# Altium PCB bai 3.PcbDoc
Units mil, origin at the board's own origin, x right, y up, seen from the top; angles counter-clockwise.
Board outline 5845.03 x 3630.03 mil, 2 copper layers (Top Layer, Bottom Layer); 20 components, 22 nets, 87 pads, 0 vias.
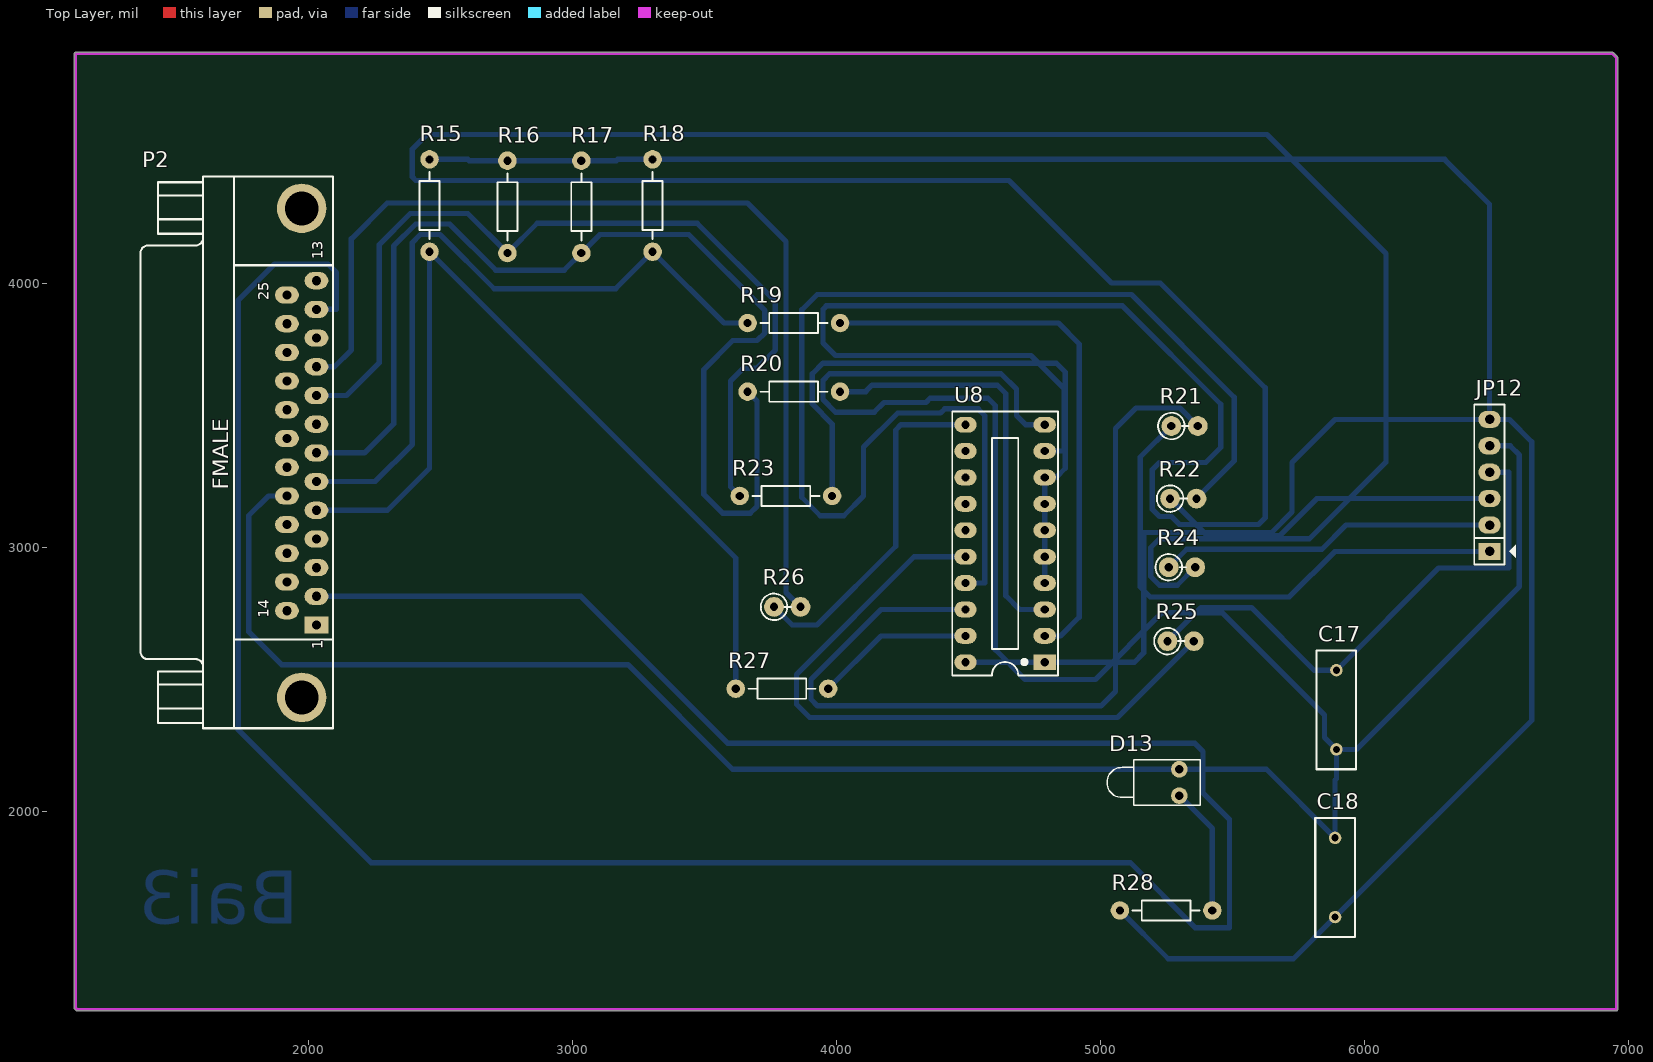
[diagram p0: Top Layer view]
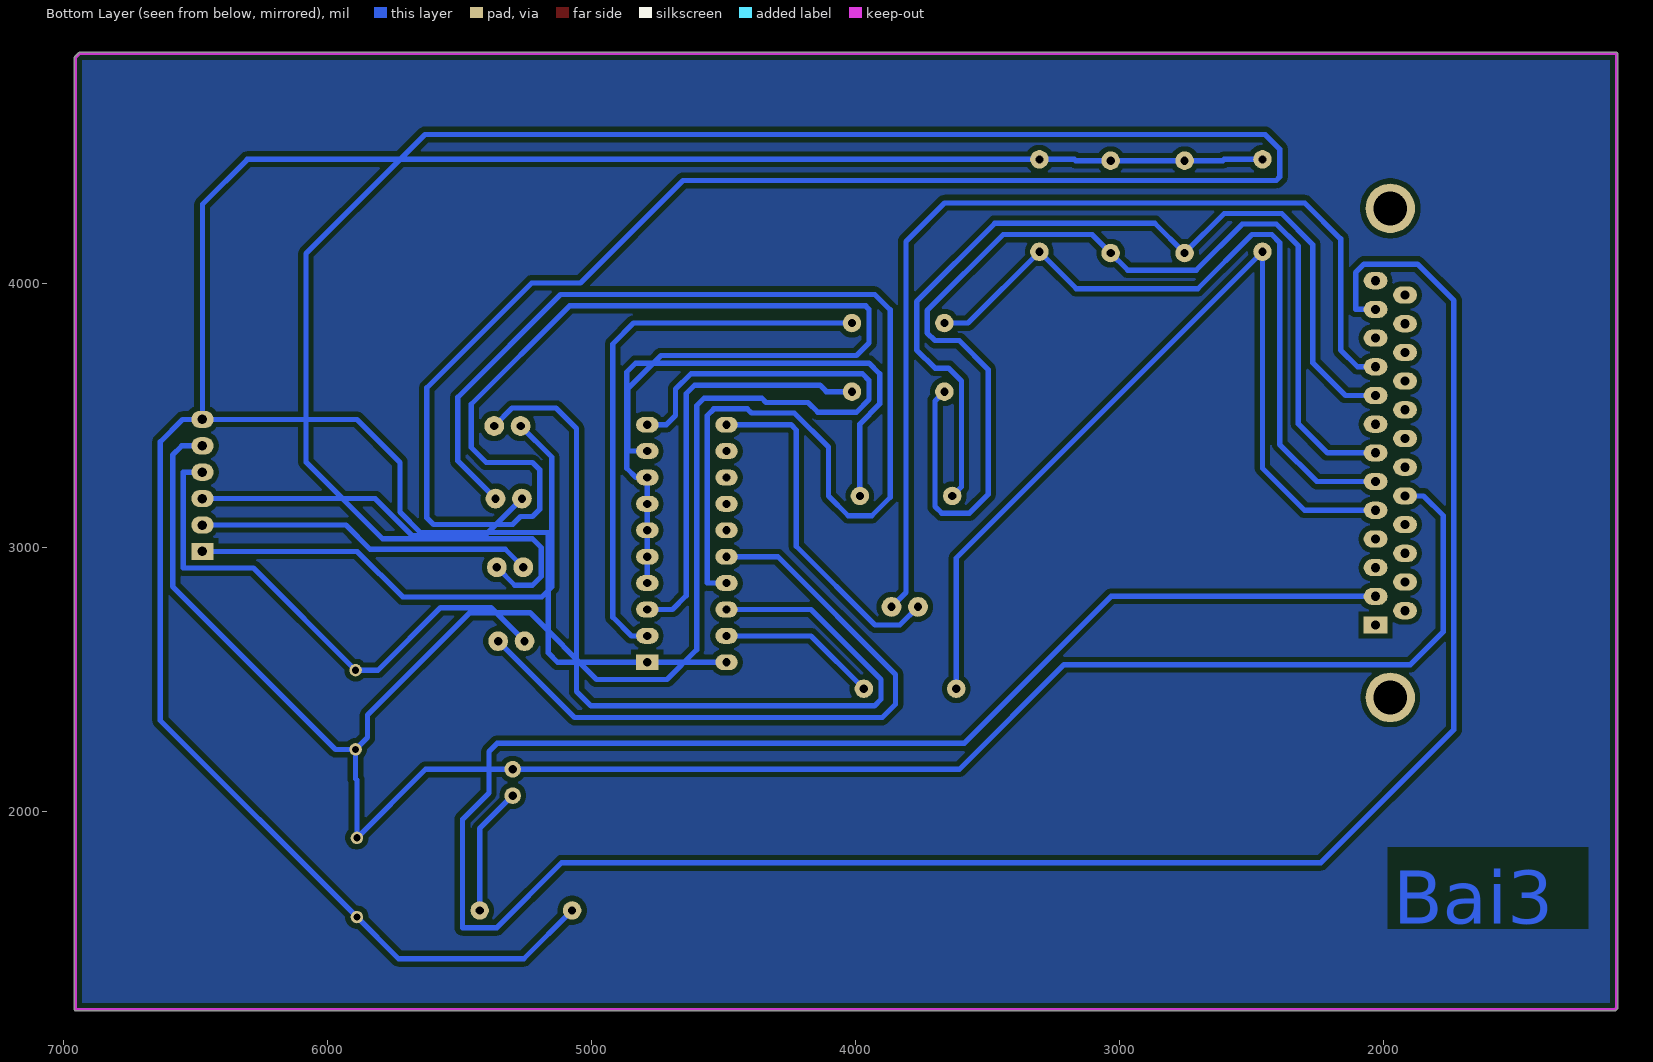
[diagram p1: Bottom Layer view, seen from below]
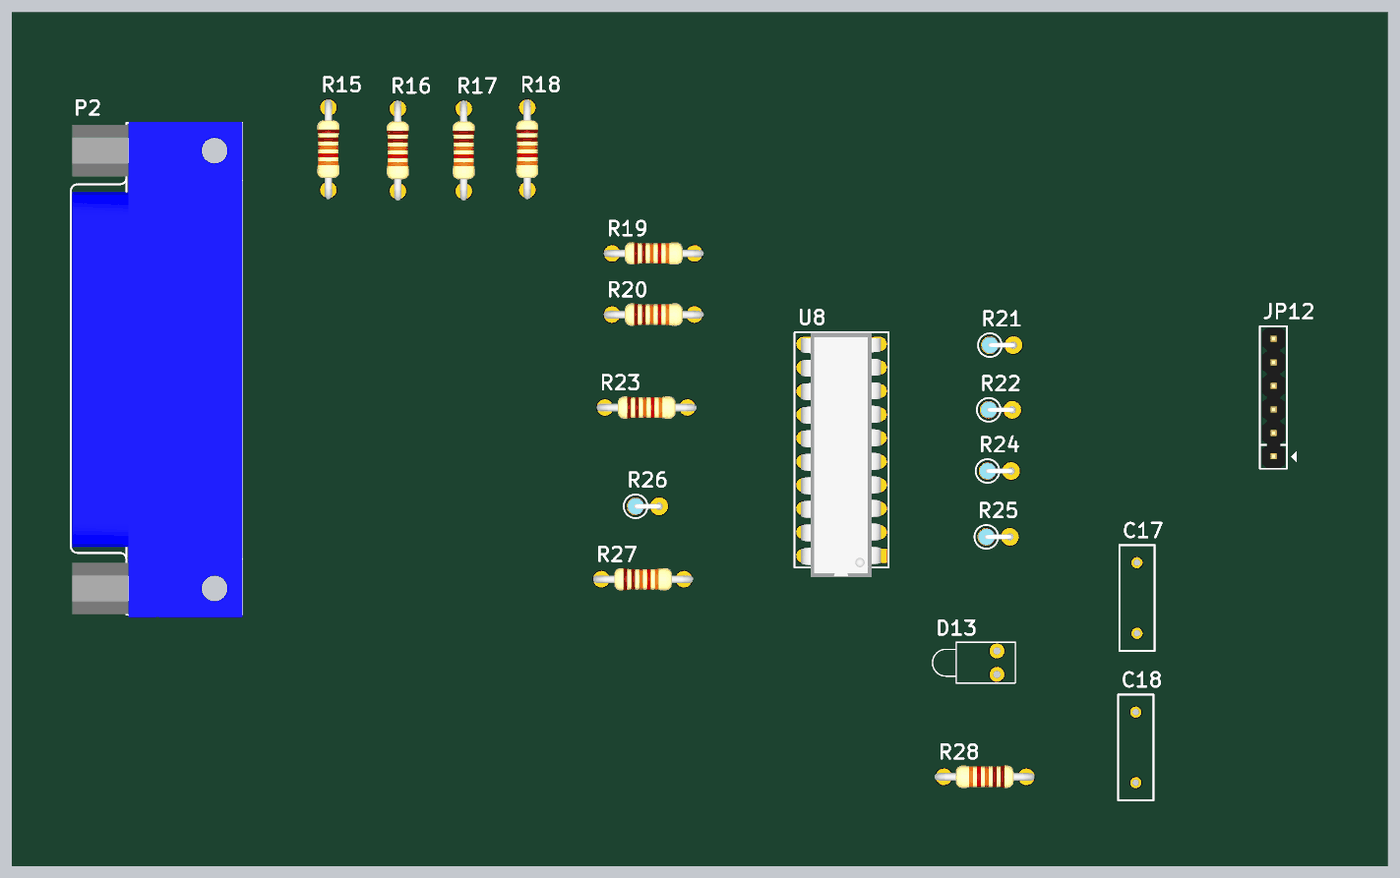
[diagram p2: 3D render of the assembled board from above, using the file's embedded part models]

## Layer stack, top to bottom
Top Solder: solder mask 0.4, Solder Resist, Dk 3.5
Top Layer: signal copper 1.4
Dielectric 1: dielectric 12.6, FR-4, Dk 4.8
Bottom Layer: signal copper 1.4
Bottom Solder: solder mask 0.4, Solder Resist, Dk 3.5

## Board outline
1114.98,1255 1114.98,4864.95 cw(c1120,4865) 1115.65,4867.5 cw(c1120,4870) 1120,4875.01 6940,4875.01 cw(c6940,4870) 6943.56,4873.53 6943.55,4873.55 6958.55,4858.55 6958.53,4858.56 cw(c6955,4855) 6960.02,4855 6960.02,1250 cw(c6955,1250) 6955,1244.98 1125,1244.98 cw(c1125,1250) 1121.44,1246.47 1121.45,1246.45 1116.45,1251.45 1116.47,1251.44 cw(c1120,1255)

## Design rules (kind name [scope] priority, off if disabled: settings)
Clearance [All] p1: gap=20 ignorepadtopadclearanceinfootprint=FALSE
PolygonConnect [All] p1: connectstyle=Relief reliefconductorwidth=10 reliefentries=4 polygonreliefangle="90 Angle" airgapwidth=10
RoomDefinition "bai 3" [InComponentClass('bai 3')] p1: confinementstyle=ConfineIn formatcopy=TRUE lockcomponents=FALSE outline 7045,1065 12450,1065 12450,3285 7045,3285
RoutingLayers [All] p1: top layer_v5=FALSE bottom layer_v5=TRUE
RoutingVias [All] p1: holewidth=28 width=50 viastyle="Through Hole" minholewidth=28 minwidth=50 maxholewidth=28 maxwidth=50
SolderMaskExpansion [All] p1: expansion=4 istentingtop=FALSE
Width [All] p1: maxlimit=30 minlimit=15 preferedwidth=20
29 further rules are at their usual default settings.

## Components (designator, comment, footprint, x,y, rotation, side; value= is the part's Value field where it differs from the comment)
C17 "Cap" RAD-0.3 5895,2385 r90 top value=10n
C18 "Cap" RAD-0.3 5890,1750 r90 top value=100n
D13 "LED" LED-1 5300,2110 r180 top
JP12 "JP6 PIN" JP6 6475,2985 r90 top value=JP7
P2 "MALE DB25" "DSB 25-F" 1975.91,3358.25 r90 top value="LPT 25"
R15 "Res1" R1/4W 2460,4120 r90 top value=4K7
R16 "Res1" R1/4W 2755,4115 r90 top value=4K7
R17 "Res1" R1/4W 3035,4115 r90 top value=4K7
R18 "Res1" R1/4W 3305,4120 r90 top value=4K7
R19 "Res1" R1/4W 4015,3850 r180 top value=1K
R20 "Res1" R1/4W 4015,3590 r180 top value=1K
R21 "Res1" R1/4W1 5270,3460 r0 top value=100
R22 "Res1" R1/4W1 5265,3185 r0 top value=100
R23 "Res1" R1/4W 3985,3195 r180 top value=1K
R24 "Res1" R1/4W1 5260,2925 r0 top value=100
R25 "Res1" R1/4W1 5255,2645 r0 top value=100
R26 "Res1" R1/4W1 3765,2775 r0 top value=100
R27 "Res1" R1/4W 3970,2465 r180 top value=1K
R28 "Res1" R1/4W 5075,1625 r0 top value=1K
U8 "74245" DIP20/W0.3 4790,2565 r90 top

## Footprints (in the part's own frame and the unit in brackets; to place one, negate y for a bottom-side part, rotate by r counter-clockwise, add the part's x,y. Pads: shape width x height; smd on the part's side, far side on the other; paste and mask are expansions set on the pad)
DIP20/W0.3 [mil] "DIP 20, 20 PIN, W 300mil, Pin to pin 100mil"
  rect 60x85 hole 31: 1(0,0)
  oval 60x85 hole 31: 2(100,0) 3(200,0) 4(300,0) 5(400,0) 6(500,0) 7(600,0) 8(700,0) 9(800,0) 10(900,0) 11(900,300) 12(800,300) 13(700,300) 14(600,300) 15(500,300) 16(400,300) 17(300,300) 18(200,300) 19(100,300) 20(0,300)
  silkscreen extent -50,-50 950,350, body extent -91,-18 945,322, height 155
"DSB 25-F" [mil] "LPT FMALE - D Subminiature; 25 Position; Right Angle; Pitch 1.385 mm"
  rect 65x90 hole 35: 1(-652.2,-55.91)
  oval 65x90 hole 35: 2(-543.5,-55.91) 3(-434.8,-55.91) 4(-326.1,-55.91) 5(-217.4,-55.91) 6(-108.7,-55.91) 7(0,-55.91) 8(108.7,-55.91) 9(217.4,-55.91) 10(326.1,-55.91) 11(434.8,-55.91) 12(543.5,-55.91) 13(652.2,-55.91) 14(-597.85,55.91) 15(-489.15,55.91) 16(-380.45,55.91) 17(-271.75,55.91) 18(-163.05,55.91) 19(-54.35,55.91) 20(54.35,55.91) 21(163.05,55.91) 22(271.75,55.91) 23(380.45,55.91) 24(489.15,55.91) 25(597.85,55.91)
  round 187.4 hole 128.35: 26(-926.22,0) 27(926.22,0)
  silkscreen extent -1043,-118 1047,610, body extent -1055,-120 1051,604, height 501
JP6 [mil] "JP6"
  rect 65x85 hole 36: 1(0,0)
  oval 65x85 hole 36: 2(100,0) 3(200,0) 4(300,0) 5(400,0) 6(500,0)
  silkscreen extent -50,-99 556,58, body extent -48,-50 548,48, height 323
LED-1 [mm] "LED; 2 Leads"
  round 1.6 hole 0.8: 1(0,1.27) 2(0,-1.27)
  silkscreen extent -2,-2.2 6.95,2.2
R1/4W [mil] "R 1/4W, 2 Pin, 350mil"
  round 70 hole 31: 1(0,0) 2(350,0)
  silkscreen extent 48,-38 302,38, body extent -40,-47 386,47, height 111
R1/4W1 [mm] "R 1/4W, 2 Pin, 150mil"
  round 1.905 hole 0.8: 1(0,0) 2(2.54,0)
  silkscreen extent -1.27,-1.28 1.65,1.28, body extent -0.89,-0.92 2.82,0.92, height 7.3
RAD-0.3 [mm] "Radial Cap, Thru-Hole; 2 Leads; 0.3 in Pin Spacing"
  round 1.2 hole 0.7: 1(-3.81,0) 2(3.81,0)
  silkscreen extent -5.71,-1.91 5.71,1.91

## Part data
C17 C18: "Capacitor", LatestRevisionDate=17-Jul-2002, LatestRevisionNote="Re-released for DXP Platform.", PackageDescription="Radial Cap, Thru-Hole; 2 Leads; 0.3 in Pin Spacing", PackageReference=RAD-0.3, Published=8-Jun-2000, Publisher="Altium Limited"
D13: library part LED1, "Typical RED GaAs LED", LatestRevisionDate=08-Jul-2005, LatestRevisionNote="Mech Layer 1 removed.", PackageDescription="LED; 2 Leads", PackageReference=LED-1, Published=8-Jun-2000, Publisher="Altium Limited"
JP12: library part JP6
P2: library part "DSB 25", "LPT 25", PackageDocument=U, DatasheetDocument=19-Mar-1999, Gender=Receptacle, LatestRevisionDate=17-Jul-2002, LatestRevisionNote="Re-released for DXP Platform.", Orientation="Right Angle", PackageReference=787202, Positions=25, Published=15-Jun-2001, Publisher="Altium Limited"
R15 R16 R17 R18 R19 R20 R23 R27 R28: library part Res1_1, "Resistor", Manufacturer="Generic Components", Class=Passive, Published=08/06/2000, Publisher="Altium Hobart Technology Centre", SubClass=Resistor
R21 R22 R24 R25 R26: library part Res1_5, "Resistor", Manufacturer="Generic Components", Class=Passive, Published=08/06/2000, Publisher="Altium Hobart Technology Centre", SubClass=Resistor
U8: "Octal bus tranceiver; 3-state", Copyright by=VanDungEvn@gmail.com

## Nets (pads, with @x,y where several pads share a name; then routed paths per layer and width w, separated by ;. In a path a pad name is that pad's centre, name@x,y a point inside that pad or via, vN(x,y) a via of type N, cw(c..) or ccw(c..) an arc to the next point about the centre after c; other vN are vias at no path point)
NetC17_1: C17.1 C18.2 D13.2 JP12.5 P2.18 U8.10 | length 11365
  Bottom Layer w20: P2.18 1850,3195.2 1775,3120.2 1775,2681 1900,2556 3212,2556 3608,2160 D13.2 5630,2160 C18.2 5890,2119 5895,2124 C17.1 ; U8.10 4718,3465 4683,3500 4683,3600 4625,3658 3975,3658 3950,3633 3950,3560 3997.77,3512.23 4144.23,3512.23 4181.34,3549.34 4340.09,3549.34 4355.75,3565 4575,3565 4603,3537 4603,2613 4716,2500 4982,2500 5235,2753 5462,2753 5850,2365 5850,2280 C17.1 ; JP12.5 6553,3385 6588,3350 6588,2852 5971,2235 C17.1
NetC17_2: C17.2 JP12.4 R25.1 | length 2039.2
  Bottom Layer w20: R25.1 5382,2772 5573,2772 5810,2535 C17.2 6282,2922 6547.58,2922 6547.58,3285 JP12.4
NetC18_1: C18.1 JP12.6 R15.2 R16.2 R17.2 R18.2 R28.1 U8.1 U8.20 | length 10908.5
  Bottom Layer w20: R15.2 2605,4470 2610,4465 R16.2 R17.2 3167,4465 3172,4470 R18.2 6305,4470 6475,4300 JP12.6 ; U8.20 U8.1 5130,2565 5165,2600 5165,3057 5650,3057 5727,3134 5727,3322 5890,3485 JP12.6 ; R28.1 5258,1442 5732,1442 C18.1 6635,2345 6635,3400 6550,3485 JP12.6
NetD13_1: D13.1 R28.2 | length 486.8
  Bottom Layer w20: D13.1 5425,1935 R28.2
NetJP12_1: JP12.1 R21.1 | length 2069.3
  Bottom Layer w20: R21.1 5152,3342 5152,2850 5190,2812 5716,2812 5889,2985 JP12.1
NetJP12_2: JP12.2 R24.1 | length 1281.3
  Bottom Layer w20: R24.1 5328,2993 5839.84,2993 5931.84,3085 JP12.2
NetJP12_3: JP12.3 R22.1 | length 1326
  Bottom Layer w20: R22.1 5405,3045 5681,3045 5821,3185 JP12.3
NetP2_2: P2.2 P2.12 | length 10657.6
  Bottom Layer w20: P2.2 3033.26,2814.74 3590,2258 5359,2258 5390,2227 5390,2070 5490,1970 5490,1560 5360,1560 5114,1806 2239,1806 1735,2310 1735,3935 1873,4073 2075,4073 2107,4041 2107,3901.75 P2.12
NetP2_5: P2.5 R15.1 R27.2 | length 3449.6
  Bottom Layer w20: P2.5 2300.85,3140.85 2460,3300 R15.1 3620,2960 R27.2
NetP2_6: P2.6 R18.1 R19.2 | length 2723.2
  Bottom Layer w20: P2.6 2254,3249.55 2395,3390.55 2395,4155 2425,4185 2500,4185 2705,3980 3165,3980 R18.1 3575,3850 R19.2
NetP2_7: P2.7 R17.1 R20.2 | length 4235
  Bottom Layer w20: P2.7 2214,3358.25 2324,3468.25 2324,4141.26 2407.74,4225 2536.14,4225 2711.14,4050 2970,4050 R17.1 3105,4185 3442,4185 3730,3897 3730,3813 3700.68,3783.67 3608.67,3783.67 3499,3674 3499,3201 3570,3130 3675,3130 3700,3155 3700,3555 R20.2
NetP2_9: P2.9 R16.1 R23.2 | length 3369.9
  Bottom Layer w20: P2.9 2145.65,3575.65 2270,3700 2270,4147.82 2387.18,4265 2605,4265 R16.1 2868.17,4228.17 3473.83,4228.17 3770,3932 3770,3748.38 3700.68,3679.05 3649.05,3679.05 3600,3630 3600,3230 R23.2
NetP2_10: P2.10 R26.2 | length 3749.1
  Bottom Layer w20: P2.10 2100.35,3684.35 2164,3748 2164,4169 2300,4305 3664,4305 3810,4159 3810,2830 R26.2
NetR19_1: R19.1 U8.2 | length 2134.1
  Bottom Layer w20: R19.1 4842,3850 4921,3771 4921,2736 4850,2665 U8.2
NetR20_1: R20.1 U8.3 | length 1585.5
  Bottom Layer w20: R20.1 4111.81,3590 4136.5,3614.69 4610.62,3614.69 4643,3582.31 4643,2817 4695,2765 U8.3
NetR21_2: R21.2 U8.18 | length 3323.4
  Bottom Layer w20: U8.18 4170,2765 3905,2500 3905,2425 3930,2400 5003,2400 5058,2455 5058,3450 5136,3528 5302,3528 R21.2
NetR22_2: R22.2 U8.17 | length 4692.8
  Bottom Layer w20: U8.17 4563,2865 4563,3500 4538,3525 4411.41,3525 4395.75,3509.34 4233.34,3509.34 4104,3380 4104,3195 4029,3120 3940,3120 3870,3190 3870,3900 3928.39,3958.39 5118.3,3958.39 5507.75,3568.95 5507.75,3327.75 R22.2
NetR23_1: R23.1 U8.4 U8.5 U8.6 U8.7 U8.8 | length 2339.2
  Bottom Layer w20: R23.1 3985,3468 3910,3543 3910,3658 3950,3698 4834,3698 4868,3664 4868,3300 4833,3265 U8.8 U8.7 U8.6 U8.5 U8.4
NetR24_2: R24.2 U8.9 | length 14350.1
  Bottom Layer w20: U8.9 4863,3365 4863,3602 4738,3727 3998,3727 3950,3775 3950,3902 3963,3915 5084.3,3915 5457,3542.3 5457,3379 5400,3322 5225,3322 5197,3294 5197,3145 5225,3117 5270,3117 5300,3087 5600,3087 5625,3112 5625,3605 5228,4002 5043,4002 4655,4390 2408,4390 2395,4403 2395,4509 2450,4564 5632,4564 6083,4113 6083,3323 5793,3033 5225,3033 5192,3000 5192,2890 5225,2857 5292,2857 R24.2
NetR25_2: R25.2 U8.16 | length 2584
  Bottom Layer w20: U8.16 4295.96,2965 3849.61,2518.66 3849.61,2406.01 3900,2355.62 5065.62,2355.62 R25.2
NetR26_1: R26.1 U8.11 | length 1326.1
  Bottom Layer w20: R26.1 3834,2706 3927.61,2706 4226,3004.39 4226,3445 4246,3465 U8.11
NetR27_1: R27.1 U8.19 | length 602.8
  Bottom Layer w20: R27.1 4170,2665 U8.19
pads on no net: P2.1 P2.3 P2.4 P2.8 P2.11 P2.13 P2.14 P2.15 P2.16 P2.17 P2.19 P2.20 P2.21 P2.22 P2.23 P2.24 P2.25 P2.26 P2.27 U8.12 U8.13 U8.14 U8.15

## Polygon pours and split planes (outlines as drawn)
no net on Bottom Layer "NONET_L02_P001" (solid, pour order 1): 1120,4870 6945,4870 6955,4860 6955,1250 1125,1250 1120,1255

## Keep-outs
Keep-Out Layer:
  lines w10: 1120,4865 1120,1255 1125,1250 6955,1250 6955,4855 6940,4870 1120,4870

## Other copper
Bottom Layer:
  text "Bai3" at 1965,1575 h200

## Text inside footprints (layer, text, board x,y; h text height)
P2: Top Overlay "FMALE" at 1696.89,3218.25 h60 r90; Top Overlay "1" at 2055.89,2615.25 h40 r90; Top Overlay "13" at 2055.89,4091.25 h40 r90; Top Overlay "14" at 1850.89,2734.25 h40 r90; Top Overlay "25" at 1850.89,3936.25 h40 r90